# EAGLE board bk-cir3 (EAGLE 9.1.0)
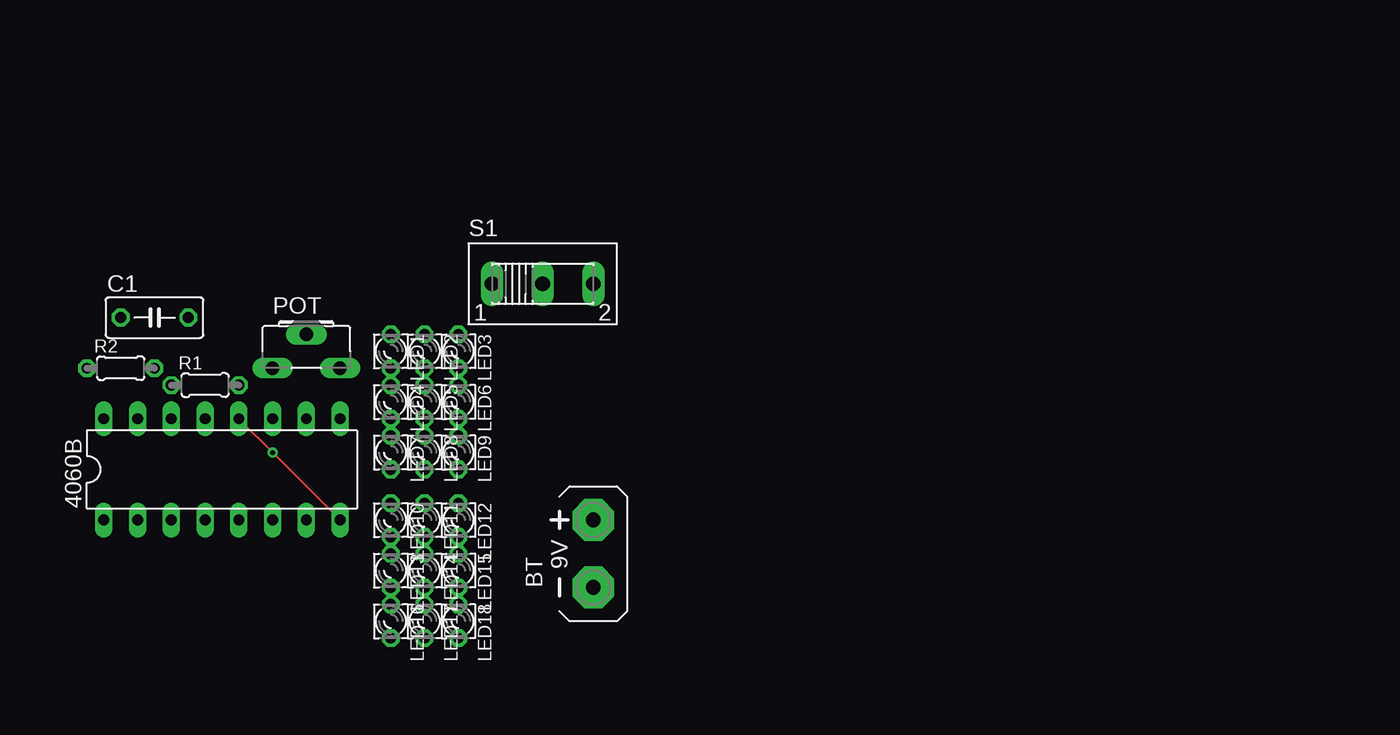
[diagram p0: board, top side]
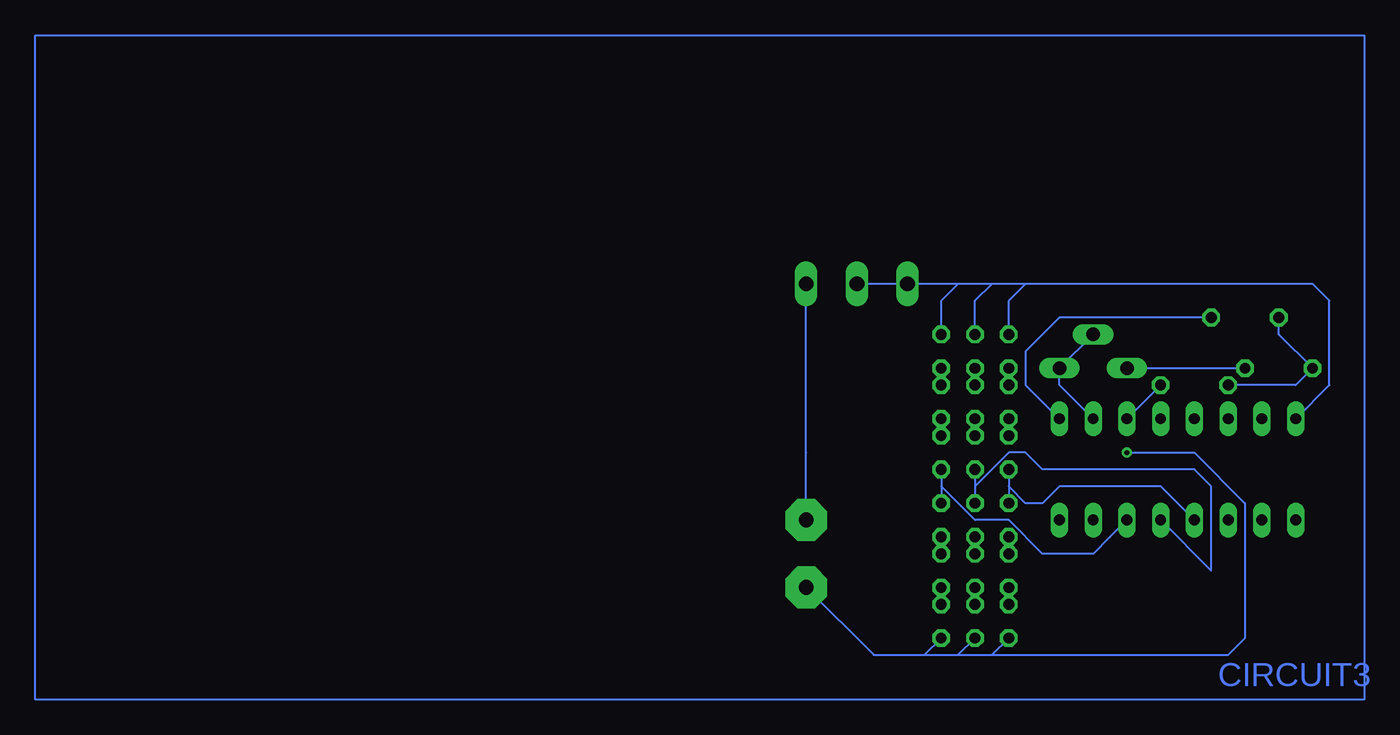
[diagram p1: board, bottom side, seen from below]

No outline drawn. Coordinates in mm, seen from the top.
Copper layers (1*16): Top 0.035mm / dielectric 1.5mm / Bottom 0.035mm
Design rules "default": minimum track width 6mil, minimum drill 0.35mm, track to track 6mil, track to pad 6mil, pad to pad 6mil, via to via 6mil, smd to smd 6mil, copper to edge 40mil, drill to drill 6mil, minimum pad ring 10mil, minimum via ring 8mil, stop-mask expansion 4mil, vias tented up to drill 0mil, thermal gap 10mil

## Footprints (pad centres in the part's own frame; a part is rotated, then mirrored left to right if it is on the bottom)
DIL16 = drill 0.813 long: 1 -8.89,-3.81; 2 -6.35,-3.81; 3 -3.81,-3.81; 4 -1.27,-3.81; 5 1.27,-3.81; 6 3.81,-3.81; 7 6.35,-3.81; 8 8.89,-3.81; 9 8.89,3.81; 10 6.35,3.81; 11 3.81,3.81; 12 1.27,3.81; 13 -1.27,3.81; 14 -3.81,3.81; 15 -6.35,3.81; 16 -8.89,3.81
AB9V = drill 1.118 pad 3.15 octagon: + 0,2.54; - 0,-2.54
C050-030X075 = drill 0.813 octagon: 1 -2.54,0; 2 2.54,0
LZR181 = drill 0.813 octagon: A -1.27,0; K 1.27,0
CA6H = drill 1.016 long: A -2.54,0; E 2.54,0; S 0,2.54
0204/5 = drill 0.813 octagon: 1 -2.54,0; 2 2.54,0
255SB = drill 1.118 long: 1 -3.81,0; 2 0,0; 3 3.81,0

## Placement (x,y rotation side)
4060B  [DIL16]  14.05,17.32 0 top
BT  [AB9V]  41.99,10.97 0 top
C1  0.1uF  [C050-030X075]  8.97,28.75 0 top
LED1  [LZR181]  26.75,26.21 270 top
LED2  [LZR181]  29.29,26.21 270 top
LED3  [LZR181]  31.83,26.21 270 top
LED4  [LZR181]  26.75,22.4 270 top
LED5  [LZR181]  29.29,22.4 270 top
LED6  [LZR181]  31.83,22.4 270 top
LED7  [LZR181]  26.75,18.59 270 top
LED8  [LZR181]  29.29,18.59 270 top
LED9  [LZR181]  31.83,18.59 270 top
LED10  [LZR181]  26.75,13.51 270 top
LED11  [LZR181]  29.29,13.51 270 top
LED12  [LZR181]  31.83,13.51 270 top
LED13  [LZR181]  26.75,9.7 270 top
LED14  [LZR181]  29.29,9.7 270 top
LED15  [LZR181]  31.83,9.7 270 top
LED16  [LZR181]  26.75,5.89 270 top
LED17  [LZR181]  29.29,5.89 270 top
LED18  [LZR181]  31.83,5.89 270 top
POT  47k  [CA6H]  20.4,24.94 0 top
R1  470k  [0204/5]  12.78,23.67 0 top
R2  10k  [0204/5]  6.43,24.94 0 top
S1  [255SB]  38.18,31.29 0 top

## Library data of the parts
4060B = ic-package
BT = battery
C1 R1 R2 = resistor
LED1-LED18 = led
POT = pot
S1 = switch

## Nets
S$1: POT.A R2.2
S$2: 4060B.10 POT.E POT.S
S$3: 4060B.9 C1.2
S$4: C1.1 R1.1 R2.1
S$5: LED1.K LED4.A
S$6: LED4.K LED7.A
S$7: LED2.K LED5.A
S$8: LED5.K LED8.A
S$9: LED6.K LED9.A
S$10: LED3.K LED6.A
S$11: LED10.K LED13.A
S$12: LED13.K LED16.A
S$13: LED14.K LED17.A
S$14: LED11.K LED14.A
S$15: LED12.K LED15.A
S$16: LED15.K LED18.A
S$18: 4060B.11 R1.2
S$19: 4060B.8 4060B.12 BT.- LED16.K LED17.K LED18.K
S$20: 4060B.16 LED1.A LED2.A LED3.A S1.1 S1.2
S$21: 4060B.5 LED8.K LED11.A
S$23: BT.+ S1.3
S$26: 4060B.6 LED9.K LED12.A
S$28: 4060B.4 LED7.K LED10.A

## Tracks (layer width: path | path; a pad name or v marks a point on that pad's centre or on a via)
S$1
  Bottom 0.152: POT.A R2.2
S$2
  Bottom 0.152: 4060B.10 22.94,23.67 POT.E POT.S
S$3
  Bottom 0.152: C1.2 22.94,28.75 25.48,26.21 25.48,24.94 25.48,23.67 4060B.9
S$4
  Bottom 0.152: R1.1 5.16,23.67 R2.1 6.43,27.48 C1.1
S$5
  Bottom 0.152: LED1.K LED4.A
S$6
  Bottom 0.152: LED4.K LED7.A
S$7
  Bottom 0.152: LED2.K LED5.A
S$8
  Bottom 0.152: LED5.K LED8.A
S$9
  Bottom 0.152: LED9.A LED6.K
S$10
  Bottom 0.152: LED6.A LED3.K
S$11
  Bottom 0.152: LED10.K LED13.A
S$12
  Bottom 0.152: LED13.K LED16.A
S$13
  Bottom 0.152: LED17.A LED14.K
S$14
  Bottom 0.152: LED14.A LED11.K
S$15
  Bottom 0.152: LED12.K LED15.A
S$16
  Bottom 0.152: LED15.K LED18.A
S$17
  Bottom 0.152: 0,0 100,0 100,50 0,50 0,0
S$18
  Bottom 0.152: R1.2 4060B.11
S$19  (via drill 0.35)
  Top 0.152: 4060B.12 v17.86,18.59 4060B.8
  Bottom 0.152: LED18.K 33.1,3.35 | BT.- 36.91,3.35 33.1,3.35 | LED17.K 30.56,3.35 | 33.1,3.35 30.56,3.35 | LED16.K 28.02,3.35 | 30.56,3.35 28.02,3.35 | v17.86,18.59 12.78,18.59 8.97,14.78 8.97,4.62 10.24,3.35 28.02,3.35
S$20
  Bottom 0.152: LED1.A 26.75,30.02 25.48,31.29 | LED2.A 29.29,30.02 28.02,31.29 | 4060B.16 2.62,23.67 2.62,30.02 3.89,31.29 25.48,31.29 | S1.2 S1.1 30.56,31.29 | 25.48,31.29 28.02,31.29 | 28.02,31.29 30.56,31.29 | LED3.A 31.83,30.02 30.56,31.29
S$21
  Bottom 0.152: 4060B.5 11.51,9.7 11.51,16.05 12.78,17.32 24.21,17.32 25.48,18.59 26.75,18.59 29.29,16.05 | 29.29,16.05 LED11.A | LED8.K 29.29,16.05
S$23
  Bottom 0.152: BT.+ 41.99,18.59 S1.3
S$26
  Bottom 0.152: 4060B.6 19.13,12.24 20.4,10.97 24.21,10.97 26.75,13.51 29.29,13.51 31.83,16.05 | LED9.K 31.83,16.05 | 31.83,16.05 LED12.A
S$28
  Bottom 0.152: 4060B.4 15.32,16.05 22.94,16.05 24.21,14.78 25.48,14.78 26.75,16.05 | LED7.K 26.75,16.05 | 26.75,16.05 LED10.A

## Text on the board
Bottom: CIRCUIT3